# Altium PCB Glucometer-I.C.- Full V2.PcbDoc
Units mm, origin at the board's own origin, x right, y up, seen from the top; angles counter-clockwise.
Board outline 38.25 x 38.25 mm, 2 copper layers (Top Layer, Bottom Layer); 25 components, 32 nets, 108 pads, 7 vias.
Unrouted connection lines stored in the file: 34.
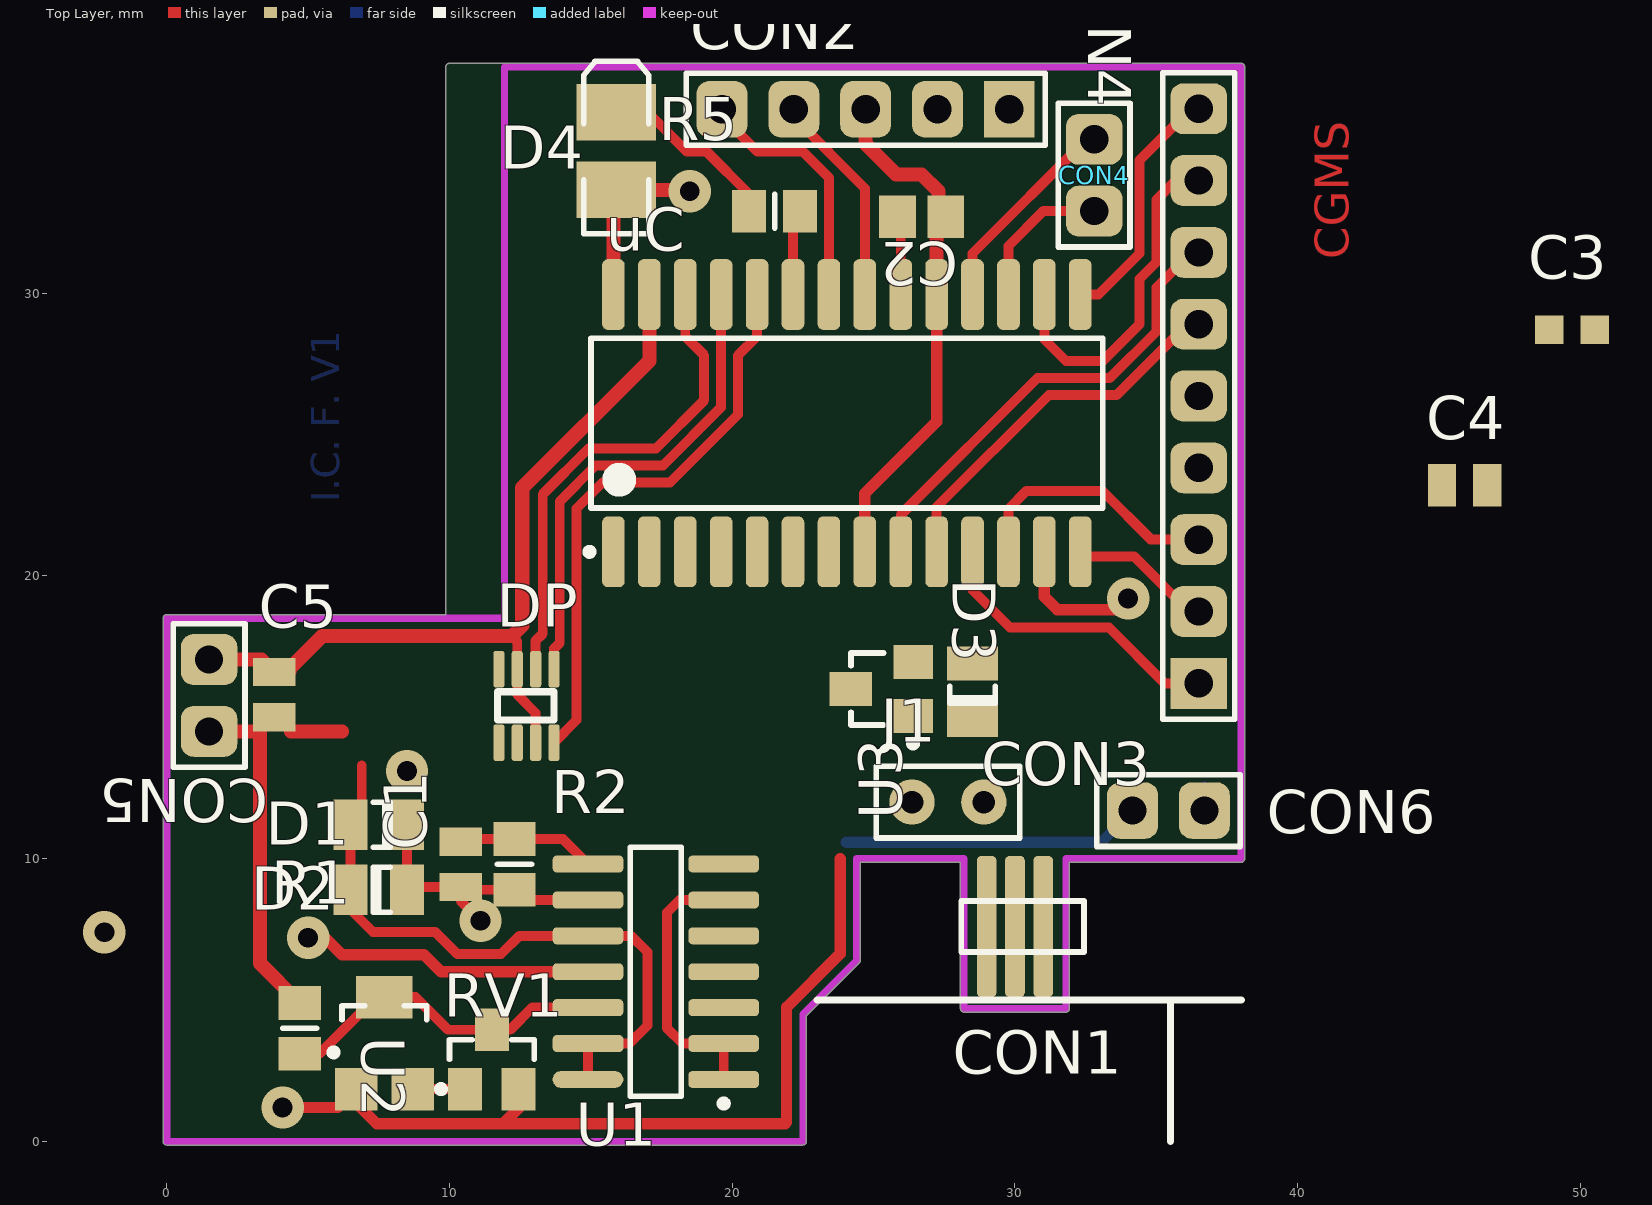
[diagram p0: Top Layer view]
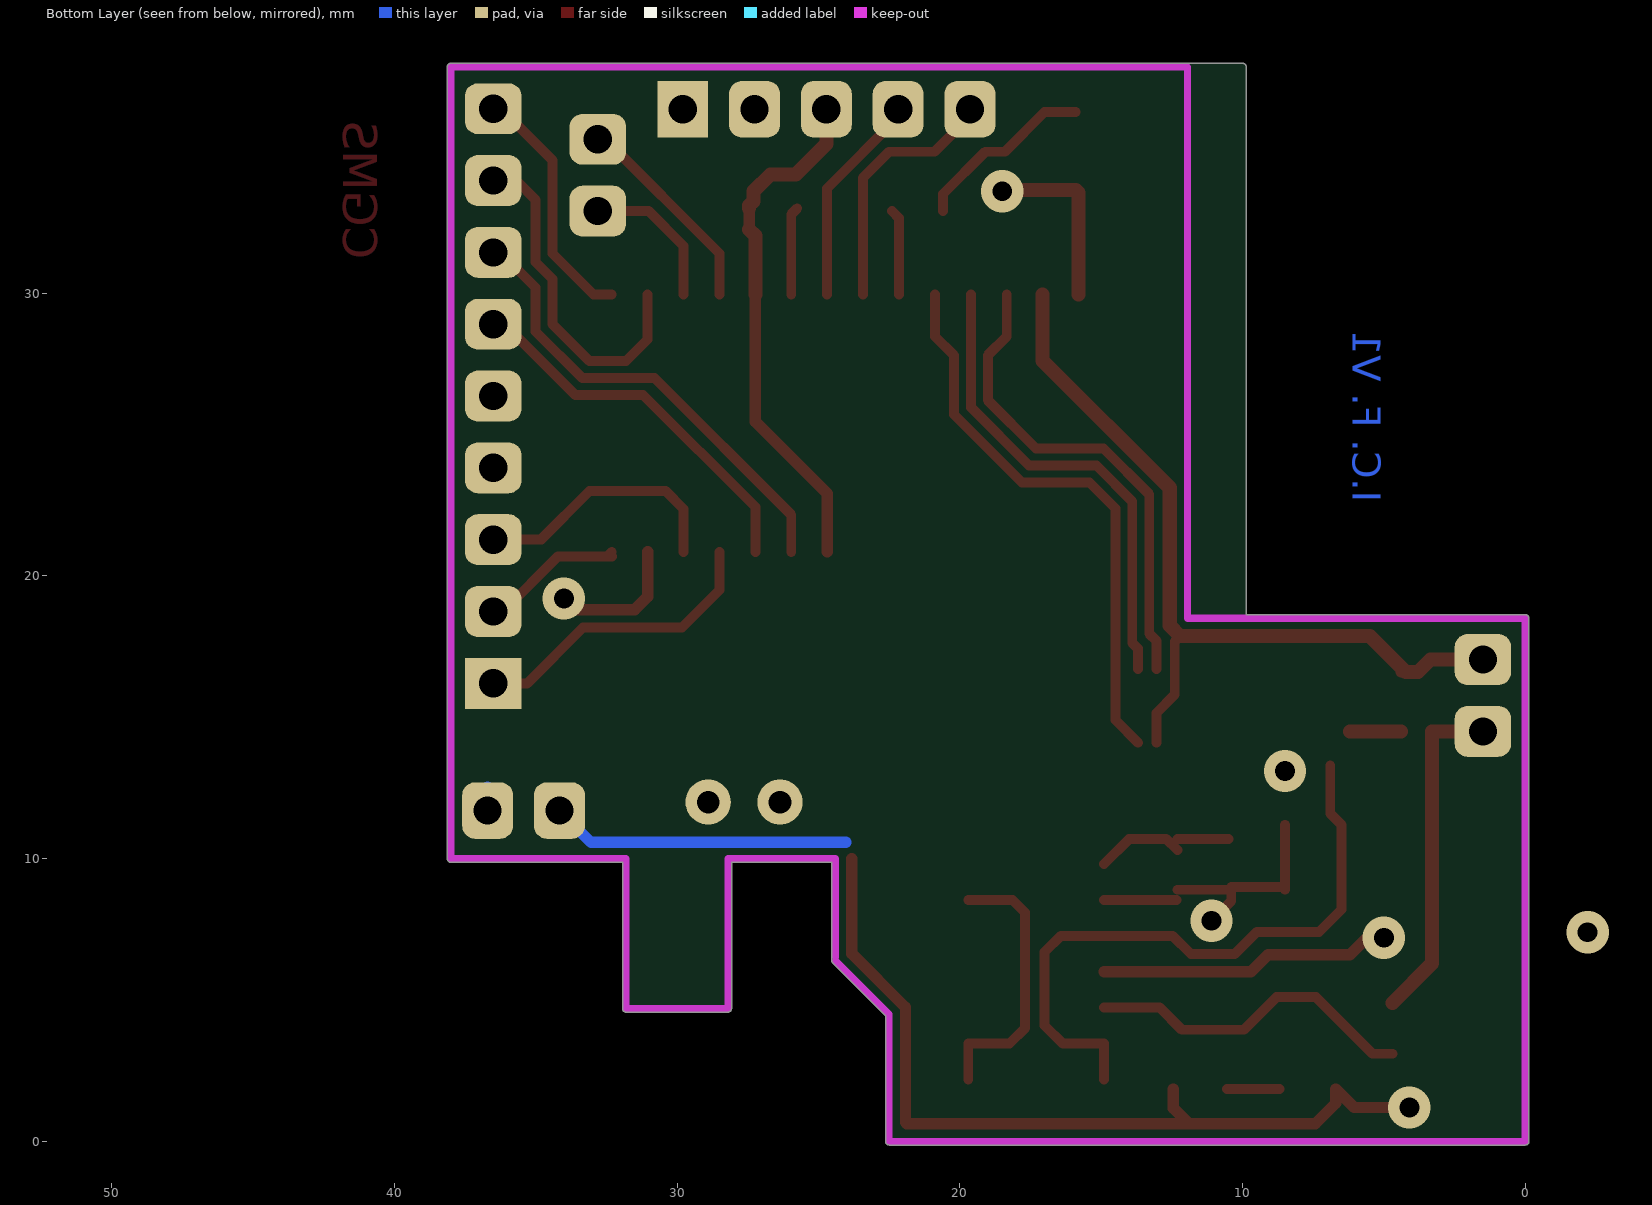
[diagram p1: Bottom Layer view, seen from below]

## Layer stack, top to bottom
Top Layer: signal copper 0.0356
Dielectric: dielectric 0.32, FR-4, Dk 4.8
Bottom Layer: signal copper 0.0356

## Board outline
-0.127,0 ccw(c0,0) 0,-0.127 22.5,-0.127 ccw(c22.5,0) 22.627,0 22.627,4.447 24.49,6.31 24.49,6.309 ccw(c24.4,6.4) 24.527,6.4 24.527,9.873 28.073,9.873 28.073,4.7 ccw(c28.2,4.7) 28.2,4.573 31.8,4.573 ccw(c31.8,4.7) 31.927,4.7 31.927,9.873 38,9.873 ccw(c38,10) 38.127,10 38.127,38 ccw(c38,38) 38,38.127 10,38.127 ccw(c10,38) 9.873,38 9.873,18.627 0,18.627 ccw(c0,18.5) -0.127,18.5

## Design rules (kind name [scope] priority, off if disabled: settings)
AssemblyTestPointUsage AssemblyTestPointUsage_1 [All] p2:
AssemblyTestpoint AssemblyTestpoint_1 [All] p2: testpointundercomponent=TRUE minsize=1.016 maxsize=2.54 preferedsize=1.524 minholesize=0 maxholesize=1.016 preferedholesize=0.813 testpointgrid=0.025 usegrid=TRUE gridtolerance=0 allowsidetop=TRUE allowsidebottom=TRUE
Clearance [All] p1: gap=0.25
ComponentClearance ComponentClearance_1 [All] p2: gap=0.254 collisioncheckmode=3 verticalgap=0.254 showdistances=FALSE
DiffPairsRouting DiffPairsRouting_1 [All] p2: maxlimit=0.254 minlimit=0.254 mostfreqgap=0.254 maxuncoupledlength=12.7
FabricationTestPointUsage TestPointUsage [All] p2: valid=0 allowmultiple=FALSE
FabricationTestpoint Testpoint [All] p2: side=3 testpointundercomponent=TRUE minsize=1.016 maxsize=2.54 preferedsize=1.524 minholesize=0 maxholesize=1.016 preferedholesize=0.813 testpointgrid=0.025 allowsidetop=TRUE allowsidebottom=TRUE usegrid=TRUE gridtolerance=0
FanoutControl Fanout_LCC [IsLCC] p1: bgadir=Out bgaviamode=Centered fanoutstyle=Auto fanoutdirection=Alternating viagrid=0.025 // Fanout_LCC (Default Rule)
FanoutControl Fanout_BGA [IsBGA] p2: bgadir=Out bgaviamode=Centered fanoutstyle=Auto fanoutdirection=Alternating viagrid=0.025 // Fanout_BGA (Default Rule)
FanoutControl Fanout_Default [All] p4: bgadir=Out bgaviamode=Centered fanoutstyle=Auto fanoutdirection=Alternating viagrid=0.025 // Fanout_Default (Default Rule)
FanoutControl Fanout_Small [(CompPinCount < 5)] p5: bgadir=Out bgaviamode=Centered fanoutstyle=Auto fanoutdirection=OutThenIn viagrid=0.025 // Fanout_Small (Default Rule)
FanoutControl Fanout_BGA_1 [IsBGA] p6: bgadir=Out bgaviamode=Centered fanoutstyle=Auto fanoutdirection=Alternating viagrid=0.025 // Fanout_BGA (Default Rule)
FanoutControl Fanout_LCC_1 [IsLCC] p7: bgadir=Out bgaviamode=Centered fanoutstyle=Auto fanoutdirection=Alternating viagrid=0.025 // Fanout_LCC (Default Rule)
FanoutControl Fanout_SOIC_1 [IsSOIC] p8: bgadir=Out bgaviamode=Centered fanoutstyle=Auto fanoutdirection=Alternating viagrid=0.025 // Fanout_SOIC (Default Rule)
FanoutControl Fanout_Small_1 [(CompPinCount < 5)] p9: bgadir=Out bgaviamode=Centered fanoutstyle=Auto fanoutdirection=OutThenIn viagrid=0.025 // Fanout_Small (Default Rule)
FanoutControl Fanout_Default_1 [All] p10: bgadir=Out bgaviamode=Centered fanoutstyle=Auto fanoutdirection=Alternating viagrid=0.025 // Fanout_Default (Default Rule)
Height Height_1 [All] p2: minheight=0 maxheight=25.4 prefheight=12.7
HoleSize [All] p1: absolutevalues=TRUE maxlimit=5 minlimit=0.025 maxpercent=80.000 minpercent=20.000
HoleSize HoleSize_1 [All] p2: absolutevalues=TRUE maxlimit=5 minlimit=0.025 maxpercent=80.000 minpercent=20.000
HoleToHoleClearance HoleToHoleClearance_1 [All] p2: gap=0.254 allowstackedmicrovias=TRUE
LayerPairs LayerPairs_1 [All] p2: enforce=TRUE
MinimumSolderMaskSliver MinimumSolderMaskSliver_1 [All] p2: minsoldermaskwidth=0.254
NetAntennae NetAntennae_1 [All] p2: netantennaetolerance=0
PasteMaskExpansion PasteMaskExpansion_1 [All] p2: expansion=0
PlaneClearance PlaneClearance_1 [All] p2: clearance=0.508
PolygonConnect [All] p1: connectstyle=Relief reliefconductorwidth=0.254 reliefentries=4 polygonreliefangle="90 Angle" airgapwidth=0.254
PolygonConnect PolygonConnect_1 [All] p2: connectstyle=Relief reliefconductorwidth=0.254 reliefentries=4 polygonreliefangle="90 Angle" airgapwidth=0.254
RoutingPriority RoutingPriority_1 [All] p2: routingpriority=0
RoutingTopology RoutingTopology_1 [All] p2: topology=Shortest
RoutingVias [All] p1: holewidth=0.7 width=1.5 viastyle="Through Hole" minholewidth=0.7 minwidth=1 maxholewidth=1 maxwidth=2
ShortCircuit ShortCircuit_1 [All] p2: allowed=FALSE
SilkToSilkClearance SilkToSilkClearance_1 [All] p2: silktosilkclearance=0.254
SilkToSolderMaskClearance SilkscreenOverComponentPads [IsPad] p2: minsilkscreentomaskgap=0.254 clearancetoexposedcopper=TRUE
SolderMaskExpansion [All] p1: expansion=0.102
SolderMaskExpansion SolderMaskExpansion_1 [All] p2: expansion=0.102
UnRoutedNet UnRoutedNet_1 [All] p2:
Width [All] p1: maxlimit=5 minlimit=0.25 preferedwidth=0.35 minimp=50.000000 maximp=50.000000 favimp=50.000000
23 further rules are at their usual default settings.

## Components (designator, comment, footprint, x,y, rotation, side; value= is the part's Value field where it differs from the comment)
C1 "Cap2" CAPC1608N#1 10.4,9.8 r90 top
C2 "Cap" CAPC2012N 26.7,32.7 r180 top
C3 "Cap" CAPC1608N#2 49.7,28.7 r180 top
C4 "Cap" CAPC1608N#1 45.9,23.2 r0 top
C5 "Cap" CAPC1608N#1 3.8,15.8 r270 top
CON1 "MHDR1X3" MHDR1X3 29,7.6 r0 top
CON2 "Header 5" HDR1X5 29.8,36.5 r180 top
CON3 "Header 9" HDR1X9 36.5,16.2 r90 top
CON4 "Header 2" HDR1X2#1 32.8,32.9 r90 top
CON5 "Header 2" HDR1X2#1 1.5,14.5 r90 top
CON6 "Header 2" HDR1X2#1 36.7,11.7 r180 top
D1 "1N4148" CD3216-1206#1 7.6,11.2 r0 top
D2 "1N4148" CD3216-1206#2 7.6,8.9 r180 top
D3 "1N4148" CD3216-1206#1 28.5,15.8 r270 top
D4 "LED2" 3.2X1.6X1.1 15.9,35 r90 top
DP "TPL0501 100K" 8SOT-23 13.7,14.1 r90 top
J1 "Header 2" HDR1X2#2 28.9,12 r180 top
R1 "Res1" RESC2012N 4.7,4 r90 top
R2 "Res1" RESC2012N 12.3,9.8 r270 top
R5 "Res1" RESC2012N 21.5,32.9 r180 top
RV1 "RPot" SOT23-3N 7.7,4.1 r90 top
U1 "LMC6044IN" M14A_N 17.3,6 r180 top
U2 "LM4041CEM3-ADJ/NOPB" MF03A_N 11.5,2.9 r90 top
U3 "Supply Voltage Supervisor" SOT23 25.3,16 r90 top
uC "PIC24FJ64GA102-I/SO" SOIC-SO28_N 24.055,25.4 r90 top

## Footprints (in the part's own frame and the unit in brackets; to place one, negate y for a bottom-side part, rotate by r counter-clockwise, add the part's x,y. Pads: shape width x height; smd on the part's side, far side on the other; paste and mask are expansions set on the pad)
3.2X1.6X1.1 [mm] "SMT LED; 2 Flat Leads"
  rect 2x2.8 smd: 1(-1.35,0) 2(1.4,0)
  silkscreen extent -2.9,-1.15 3.2,1.15
8SOT-23 [mm]
  rrect50% 1.3x0.4 smd: 1(0,1.95) 2(0,1.3) 3(0,0.65) 4(0,0) 5(2.6,0) 6(2.6,0.65) 7(2.6,1.3) 8(2.6,1.95)
  silkscreen extent 0.8,0 1.8,2
CAPC1608N#1 [mm] "Chip Capacitor, Body 1.6x0.8mm, IPC Medium Density"
  rect 1x1.5 smd: 1(-0.8,0) 2(0.8,0)
  body extent -0.87,-0.48 0.87,0.48, height 0.85
CAPC1608N#2 [mm] "Chip Capacitor, Body 1.6x0.8mm, IPC Medium Density"
  rect 1x1 smd: 1(-0.8,0) 2(0.8,0)
  body extent -0.87,-0.48 0.87,0.48, height 0.85
CAPC2012N [mm] "Chip Capacitor, Body 2.0x1.3mm, IPC Medium Density"
  rect 1.3x1.5 smd: 1(-0.85,0) 2(0.85,0)
  body extent -1.1,-0.72 1.1,0.72, height 1.1
CD3216-1206#1 [mm] "Chip Diode; Body 3.2 x 1.6 mm (LxW typ)"
  rect 1.2x1.8 smd: 1(-1.1,0) 2(0.9,0)
  silkscreen extent -0.3,-0.8 0.3,0.8
CD3216-1206#2 [mm] "Chip Diode; Body 3.2 x 1.6 mm (LxW typ)"
  rect 1.2x1.8 smd: 1(-0.9,0) 2(1.1,0)
  silkscreen extent -0.3,-0.8 0.3,0.8
HDR1X2#1 [mm] "Connector; Header; 2 Position"
  rrect50% 1.8x2 hole 1: 1(0,0) 2(2.54,0)
  silkscreen extent -1.27,-1.27 3.81,1.27
HDR1X2#2 [mm] "Connector; Header; 2 Position"
  round 1.6 hole 0.8: 1(0,0) 2(2.54,0)
  silkscreen extent -1.27,-1.27 3.81,1.27
HDR1X5 [mm] "Connector; Header; 5 Position"
  rect 1.8x2 hole 1: 1(0,0)
  rrect50% 1.8x2 hole 1: 2(2.54,0) 3(5.08,0) 4(7.62,0) 5(10.16,0)
  silkscreen extent -1.27,-1.27 11.43,1.27
HDR1X9 [mm] "Connector; Header; 9 Position"
  rect 1.8x2 hole 1: 1(0,0)
  rrect50% 1.8x2 hole 1: 2(2.54,0) 3(5.08,0) 4(7.62,0) 5(10.16,0) 6(12.7,0) 7(15.24,0) 8(17.78,0) 9(20.32,0)
  silkscreen extent -1.27,-1.27 21.59,1.27
M14A_N [mm] "SOIC, 14-Leads, Body 8.6x3.9mm, Pitch 1.27mm, IPC Medium Density"
  rrect50% 2.5x0.6 smd: 1(-2.4,3.81) 2(-2.4,2.54) 3(-2.4,1.27) 4(-2.4,0) 5(-2.4,-1.27) 6(-2.4,-2.54) 7(-2.4,-3.81) 8(2.4,-3.81) 9(2.4,-2.54) 10(2.4,-1.27) 11(2.4,0) 12(2.4,1.27) 13(2.4,2.54)
  oval 2.5x0.6 smd: 14(2.4,3.81)
  silkscreen extent -2.53,-4.4 0.9,4.78, body extent -2,-4.38 2,4.38, height 1.75
MF03A_N [mm] "SOT23, 3-Leads, Body 2.9x1.3mm, Pitch 0.95mm, Lead Span 2.4mm, IPC Medium Density"
  rect 1.5x1.2 smd: 1(-1.05,0.95) 2(-1.05,-0.95) 3(1.05,0)
  silkscreen extent -1.17,-1.5 0.7,1.92, body extent -0.7,-1.5 0.7,1.5, height 1.12
MHDR1X3 [mm] "Connector; Header; 3 Position"
  rrect50% 0.7x5 smd: 1(0,0) 2(1,0) 3(2,0)
  silkscreen extent -0.9,-0.9 3.44,0.9
RESC2012N [mm] "Chip Resistor, Body 2.0x1.3mm, IPC Medium Density"
  rect 1.2x1.5 smd: 1(-0.9,0) 2(0.9,0)
  silkscreen extent 0,-0.6 0,0.6, body extent -1.07,-0.7 1.07,0.7, height 0.65
SOIC-SO28_N [mm] "SOIC, 28-Leads, Body 17.9x7.5mm, Pitch 1.27mm, IPC Medium Density"
  rrect50% 2.5x0.8 smd: 1(-4.55,8.255) 2(-4.55,6.985) 3(-4.55,5.715) 4(-4.55,4.445) 5(-4.55,3.175) 6(-4.55,1.905) 7(-4.55,0.635) 8(-4.55,-0.635) 9(-4.55,-1.905) 10(-4.55,-3.175) 11(-4.55,-4.445) 12(-4.55,-5.715) 13(-4.55,-6.985) 14(-4.55,-8.255) 15(4.55,-8.255) 16(4.55,-6.985) 17(4.55,-5.715) 18(4.55,-4.445) 19(4.55,-3.175) 20(4.55,-1.905) 21(4.55,-0.635) 22(4.55,0.635) 23(4.55,1.905) 24(4.55,3.175) 25(4.55,4.445) 26(4.55,5.715) 27(4.55,6.985) 28(4.55,8.255)
  silkscreen extent -4.67,-9.05 3,9.23, body extent -3.8,-9.06 3.8,9.06, height 2.65
SOT23 [mm] "SOT-23; 3 Leads; Body 3.0 x 2.6 mm, inc. leads (LxW max)"
  rect 1.2x1.4 smd: 1(-0.95,-1.1) 2(0.95,-1.1)
  rect 1.2x1.5 smd: 3(0,1.1)
  silkscreen extent -2.05,-1.22 1.28,1.1
SOT23-3N [mm] "SOT23, 3-Leads, Body 2.9x1.3mm, Pitch 0.95mm, Lead Span 2.5mm, IPC Medium Density"
  rect 1.5x1.5 smd: 1(-2.25,1) 2(-2.25,-1)
  rect 1.5x2 smd: 3(1,0)
  silkscreen extent -1.07,-1.5 0.7,1.92, body extent -0.7,-1.5 0.7,1.5, height 1.1

## Part data
C1 C2 C3 C4 C5: "Capacitor"
CON1: "Header, 3-Pin"
CON2: "Header, 5-Pin"
CON3: "Header, 9-Pin"
CON4 CON5 CON6 J1: "Header, 2-Pin"
D1 D2 D3: "High Conductance Fast Diode"
D4: "Typical RED, GREEN, YELLOW, AMBER GaAs LED"
DP: library part "Digital Potentiometer TI"
R1 R2 R5: "Resistor"
RV1: "Potentiometer"
U1: "CMOS Quad Micropower Operational Amplifier, 14-pin MDIP"
U2: "Precision Micropower Shunt Voltage Reference, 3-pin SOT-23, Pb-Free"
uC: "General purpose 16-bit Flash Microcontroller with nanoWatt XLP, 64KB Flash, 8KB SRAM, 28-Pin SOIC, Industrial Temperature"

## Via types
v1: diameter 1.5, hole 0.7, Top Layer to Bottom Layer, 7 vias

## Nets (pads, with @x,y where several pads share a name; then routed paths per layer and width w, separated by ;. In a path a pad name is that pad's centre, name@x,y a point inside that pad or via, vN(x,y) a via of type N, cw(c..) or ccw(c..) an arc to the next point about the centre after c; other vN are vias at no path point)
3.3V: C3.2 C4.2 C5.2 CON2.2 CON3.4 CON5.1 CON6.1 D4.1 DP.2 R1.2 U1.4 U3.3 uC.13 uC.28 | length 25.6
  Top Layer w0.4: uC.13 31.04,19.26 31.5,18.8 33.6,18.8 v1(34,19.2)
  Top Layer w0.5: CON5.1 3.3,14.5 3.3,6.3 R1.2 ; C5.2@4.4,14.5 6.2,14.5 ; uC.28 D4.1@15.8,33.55 ; D4.1 v1@18.45,33.65
  Bottom Layer w0.45: CON6.1 CON6.1@36.7,12.5
  other v1: -2.2,7.4 18.5,33.6
CNT: CON1.3 U1.7 uC.4
CSCON: CON3.7 uC.9 | length 16.6
  Top Layer w0.35: uC.9 25.96,22.16 30.8,27 33.351,27 35,28.649 35,30.2 36.24,31.44 CON3.7
CSDATA: CON3.3 uC.12 | length 9.2
  Top Layer w0.35: uC.12 29.77,22.37 30.4,23 33.1,23 34.82,21.28 ; 34.8,21.28 CON3.3
DIN: DP.5 uC.25 | length 17.1
  Top Layer w0.35: DP.5 13.7,17.425 13.9,17.625 13.9,22.636 15.164,23.9 17.549,23.9 19.61,25.961 uC.25
GND: C2.1 C3.1 C4.1 C5.1 CON2.3 CON3.5 CON5.2 CON6.2 DP.3 DP.7 RV1.1 U1.11 U2.2 U3.1 uC.8 uC.19 uC.27 | length 100.1
  Top Layer w0.35: 12.21,17.873 12.4,17.683 DP.7 12.4,15.8 13.045,15.155 DP.3@13.045,14.1
  Top Layer w0.4: v1(4.1,1.2) 6.05,1.2 RV1.1 6.7,1.354 7.427,0.627 11.9,0.627 ; C5.1@4.227,16.6 C5.1@4.4,16.6 ; v1@4.7,7.2 5.6,7.2 6.2,6.6 9.1,6.6 9.7,6 U1.11 ; U2.2 12.45,1.177 11.9,0.627 ; 23.823,10 23.823,6.639 21.923,4.739 21.923,0.677 21.873,0.627 11.9,0.627 ; uC.8 24.69,22.91 27.23,25.45 uC.19 ; C2.1@27.45,32.25 C2.1@27.45,33.1
  Top Layer w0.5: CON5.2 3.36,17.04 C5.1 4.227,16.6 5.5,17.873 12.21,17.873 12.577,18.24 12.577,23.116 17.07,27.609 uC.27 ; CON2.3 24.72,35.28 25.8,34.2 26.7,34.2 27.3,33.6 27.3,33.25 27.45,33.1 C2.1@27.45,33 ; uC.19 27.23,32.03 C2.1@27.45,32.25
  Bottom Layer w0.4: 24.026,10.577 33.037,10.577 CON6.2
  other v1: 5,7.2
IRQ1: CON3.1 uC.11 | length 10.7
  Top Layer w0.35: uC.11 28.5,19.5 29.825,18.175 33.325,18.175 35.3,16.2 CON3.1
LED1: R5.1 uC.23 | length 3.1
  Top Layer w0.35: uC.23 22.15,32.65 R5.1
MCLR: CON2.1 D3.2 uC.1
NetC2_2: C2.2 uC.20 | length 3.1
  Top Layer w0.35: C2.2@25.75,33 25.96,32.79 uC.20
NetD3_1: D3.1 U3.2
NetD4_2: D4.2 R5.2 | length 6.5
  Top Layer w0.35: D4.2 17,36.4 18.4,35 19.1,35 20.6,33.5 R5.2
NetR1_1: R1.1 RV1.3 U1.12 U2.3 | length 11.8
  Top Layer w0.35: R1.1 5.4,3.1 7.4,5.1 RV1.3 8.8,5.1 9.95,3.95 U2.3 12.15,3.95 12.93,4.73 U1.12
NetRV1_3: RV1.2 U2.1 | length 1.8
  Top Layer w0.35: RV1.2 U2.1
NetU1_1: U1.1 U1.2 U1.6 | length 9.8
  Top Layer w0.35: U1.1 U1.2 18.24,3.46 17.7,4 17.7,8.1 18.14,8.54 U1.6
NetuC_7: uC.7
PEGC2: CON2.5 uC.22 | length 9.1
  Top Layer w0.35: CON2.5 19.64,36.26 20.9,35 22.5,35 23.42,34.08 23.42,33.831 23.425,33.826 23.425,31.974 23.42,31.969 uC.22
PEGD2: CON2.4 uC.21 | length 7.6
  Top Layer w0.35: CON2.4 22.18,36.22 24.7,33.7 24.7,29.96 uC.21
REF: CON1.1 U1.3 uC.6
RESET: CON3.6 uC.10 | length 13.5
  Top Layer w0.35: uC.10 27.23,22.43 31.2,26.4 33.6,26.4 36.1,28.9 CON3.6
SCK: CON3.9 uC.15 | length 8.8
  Top Layer w0.35: uC.15 32.95,29.95 34.4,31.4 34.4,34.7 36.22,36.52 CON3.9
SCLK: DP.4 uC.24 | length 20.2
  Top Layer w0.35: DP.4 14.5,14.9 14.5,22.388 15.412,23.3 17.8,23.3 20.21,25.71 20.21,27.8 20.88,28.47 uC.24
SDI: CON3.8 uC.16 | length 12.6
  Top Layer w0.3: CON3.8@36.16,33.96 36.48,33.96 CON3.8@36.5,33.96
  Top Layer w0.35: uC.16 31.04,28.36 31.8,27.6 33.1,27.6 ; 33.103,27.6 34.4,28.897 34.4,30.5 35,31.1 35,33.3 35.66,33.96 36.48,33.96 CON3.8
SDO: CON3.2 uC.14 | length 5.2
  Top Layer w0.35: uC.14@32.3,20.68 34.22,20.68 36.16,18.74 CON3.2 ; uC.14 uC.14@32.48,20.68
SS: DP.6 uC.26 | length 17.4
  Top Layer w0.35: DP.6 13.05,17.705 13.3,17.955 13.3,19.5 13.3,22.885 14.915,24.5 17.3,24.5 19.01,26.21 19.01,27.8 18.34,28.47 uC.26
U1RX: CON4.2 uC.18 | length 7.4
  Top Layer w0.3: CON4.2@32.54,35.44 CON4.2
  Top Layer w0.35: uC.18 28.5,31.4 CON4.2@32.54,35.44
U1TX: CON4.1 uC.17 | length 5.3
  Top Layer w0.35: uC.17 29.77,31.67 31,32.9 CON4.1
VCTRL: DP.1 U1.5 uC.5
  other v1: 8.5,13.1
VGND: D1.1 D2.2 DP.8 U1.10 U1.13 U1.14 uC.3 | length 23.2
  Top Layer w0.35: 6.9,13.3 6.9,11.6 D1.1 D2.2 6.5,8.2 7.3,7.4 9.5,7.4 10.275,6.625 11.825,6.625 12.47,7.27 U1.10 16.43,7.27 17,6.7 17,4.1 16.36,3.46 U1.13 U1.14
VOUT: C1.2 R2.1 U1.8 uC.2 | length 4.9
  Top Layer w0.35: C1.2@10.5,10.7 R2.1 ; R2.1@12.3,10.3 12.7,10.7 14.01,10.7 U1.8
WRK: CON1.2 J1.1
WRK-IN: C1.1 D1.2 D2.1 J1.2 R2.2 U1.9 | length 9.9
  Top Layer w0.35: D2.1 D1.2 ; D2.1@8.6,9 C1.1 10.4,8.5 v1(11.1,7.8) ; C1.1@10.5,8.9 R2.2 ; R2.2@12.34,8.54 U1.9

## Keep-outs
Keep-Out Layer:
  lines w0.254: 0,15.9 0,0 ; 24.4,6.4 22.5,4.5 22.5,0 0,0 ; 24.4,6.5 24.4,10 26,10 28.2,10 28.2,4.7 31.8,4.7 31.8,10 38,10 38,38 11.95,38 11.95,18.5 0,18.5 0,0

## Other copper
Top Layer:
  text "CGMS" at 41.8,31.2 h1.2 r90
Bottom Layer:
  text "I.C. F. V1" at 6.1,22.6 h1 r90

## Silkscreen, mask and mechanical layers (free items; w line width, h text height)
Top Overlay:
  lines w0.254: 23,5 38,5 ; 35.5,0 35.5,5
Mechanical 16:
  lines w0.127: -132.175,-31.975 -127.095,-31.975 ; -132.175,22 -127.095,22 ; -132.175,75.975 -127.095,75.975 ; -62.325,-85.95 -62.325,-80.87 ; -62.325,124.87 -62.325,129.95 ; 7.525,-85.95 7.525,-80.87 ; 7.525,124.87 7.525,129.95 ; 77.375,-85.95 77.375,-80.87 ; 77.375,124.87 77.375,129.95 ; 142.145,-31.975 147.225,-31.975 ; 142.145,22 147.225,22 ; 142.145,75.975 147.225,75.975 ; -132.175,-85.95 -132.175,129.95 147.225,129.95 147.225,-85.95 -132.175,-85.95 ; -127.095,-80.87 142.145,-80.87 142.145,124.87 -127.095,124.87 -127.095,-80.87
  text "1" at -97.851,126.521 h1.78
  text "2" at -27.984,126.521 h1.78
  text "3" at 41.739,126.521 h1.78
  text "4" at 111.614,126.521 h1.78
  text "A" at -130.27,100.664 h1.78
  text "A" at 144.05,100.664 h1.78
  text "B" at 144.425,49.35 h1.78
  text "B" at -130.27,46.689 h1.78
  text "C" at -130.27,-7.286 h1.78
  text "C" at 144.05,-7.286 h1.78
  text "D" at -130.27,-61.134 h1.78
  text "D" at 144.05,-61.134 h1.78
  text "1" at -97.851,-84.299 h1.78
  text "2" at -27.984,-84.299 h1.78
  text "3" at 41.739,-84.299 h1.78
  text "4" at 111.614,-84.299 h1.78

## Dimensions
0,42 to 42,42 on Top Overlay